# Altium PCB USB_pwrmtr_v2.PcbDoc (part 1 of 2)
Units mm, origin at the board's own origin, x right, y up, seen from the top; angles counter-clockwise.
Board outline 25 x 55.1 mm, 4 copper layers (Top Layer, Layer 1, Layer 2, Bottom Layer), stack 1.564 mm thick; 63 components, 50 nets, 344 pads, 256 vias.
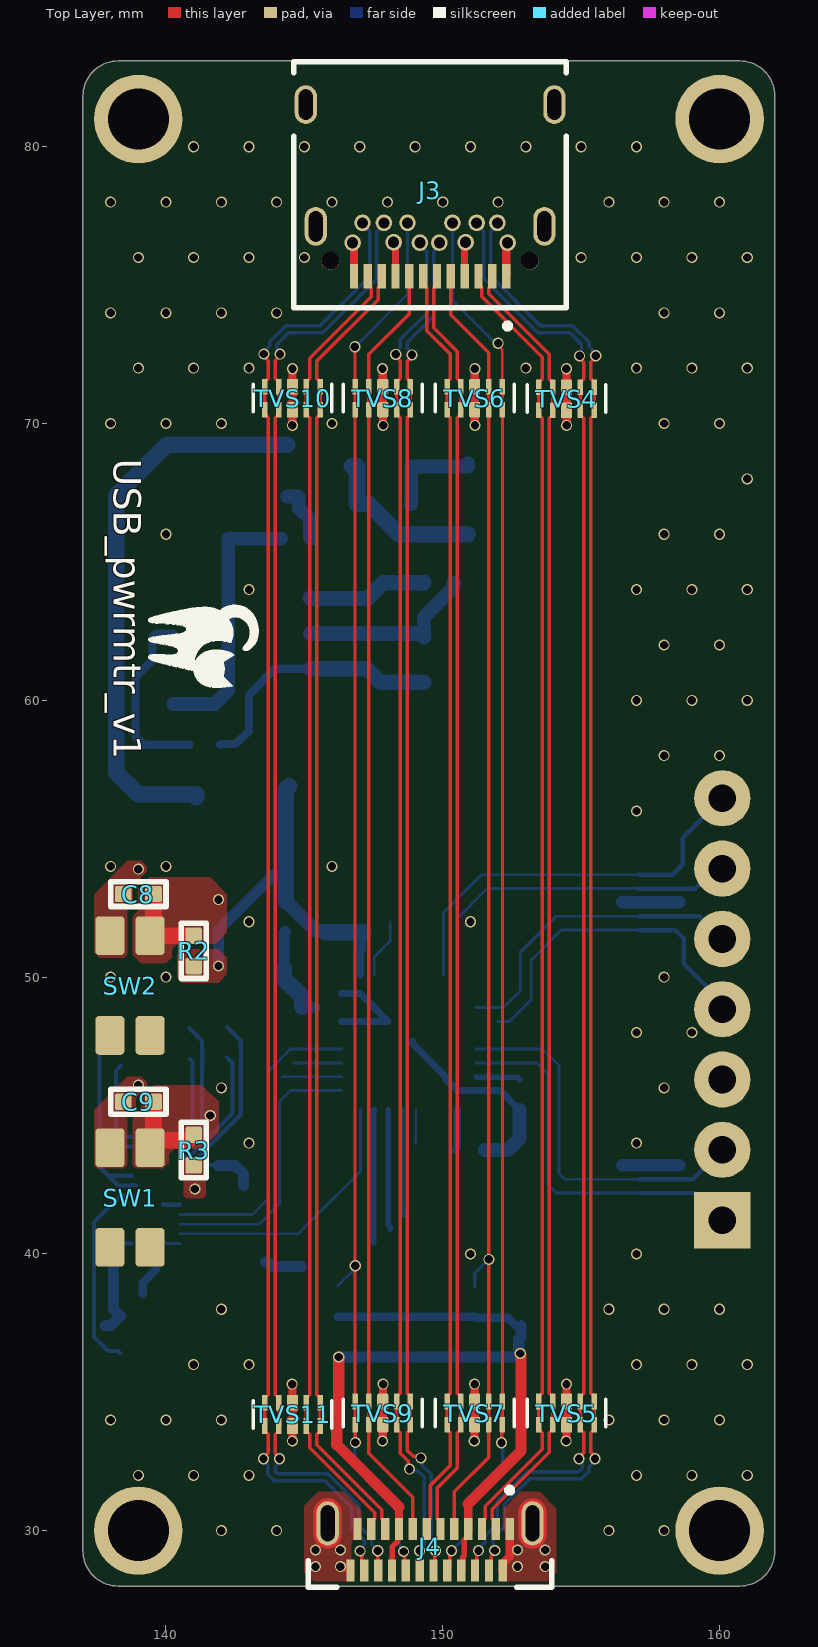
[diagram p0: Top Layer view]
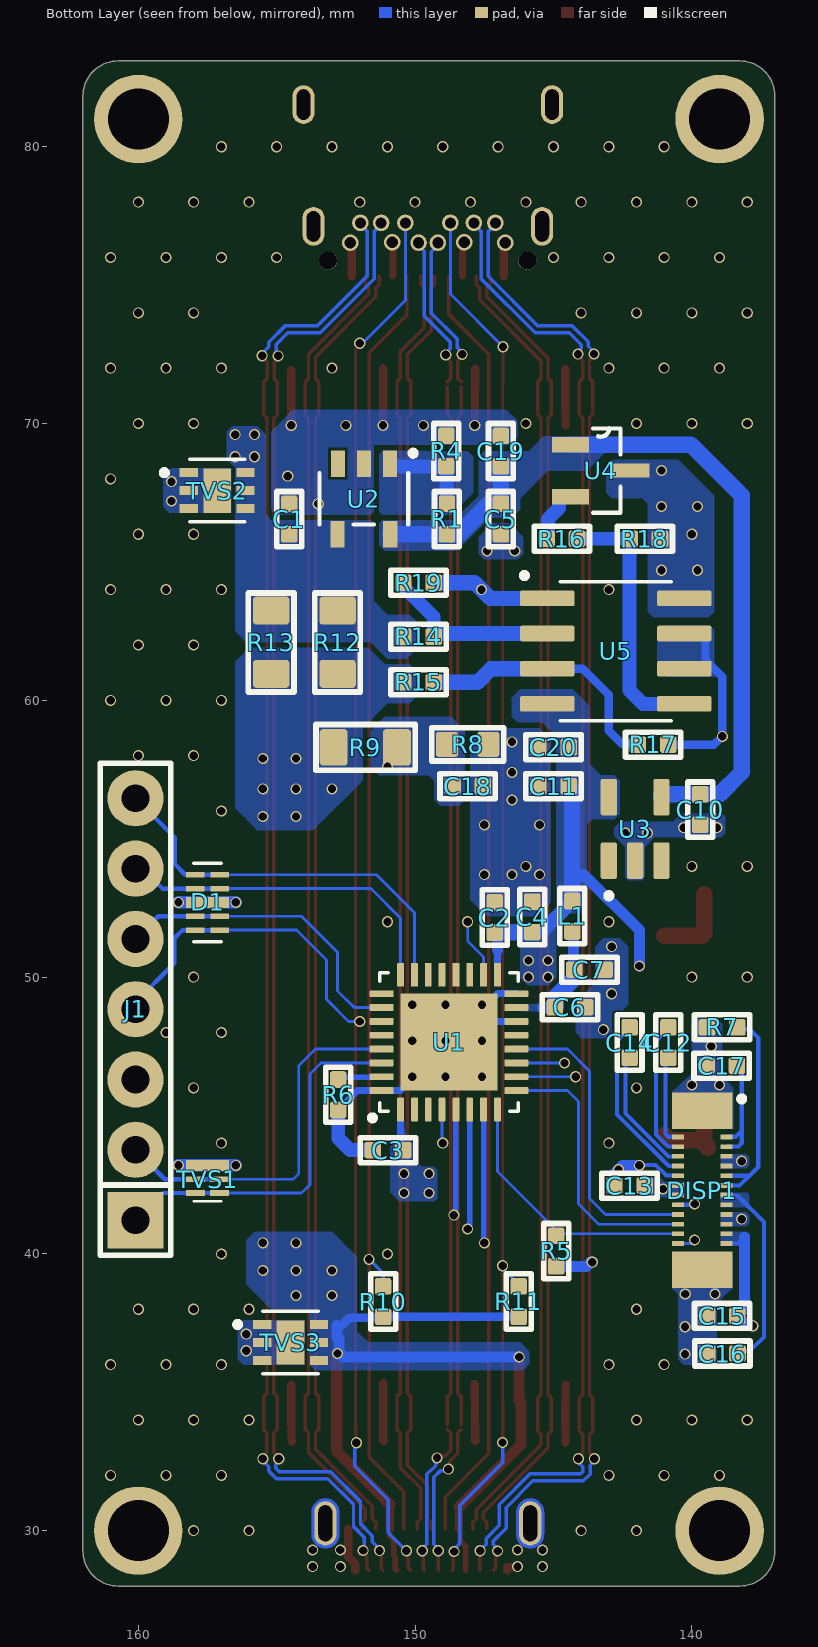
[diagram p1: Bottom Layer view, seen from below]
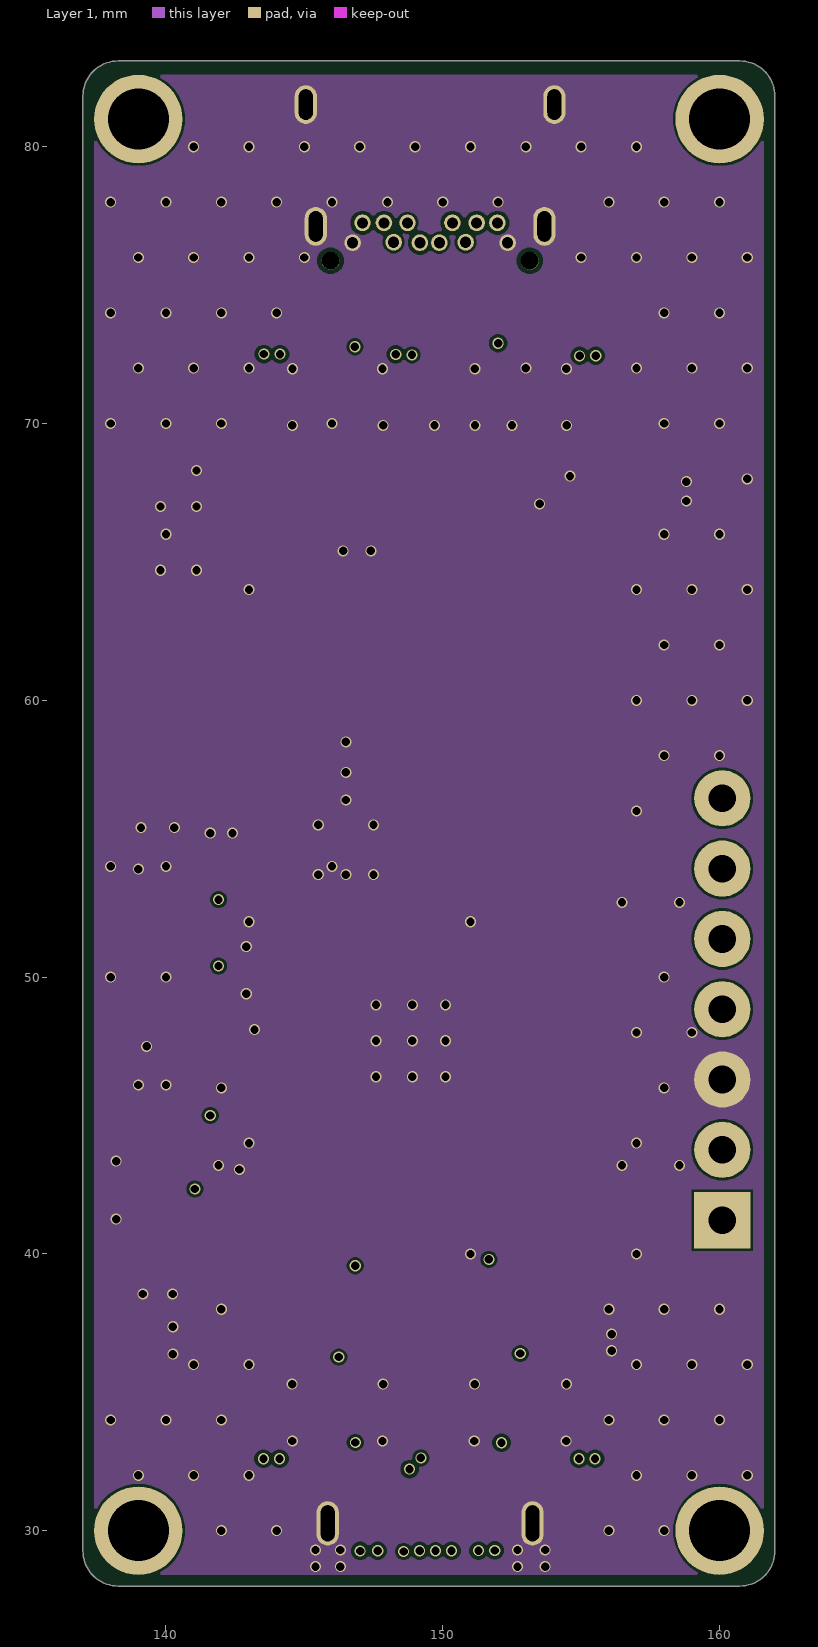
[diagram p2: Layer 1]
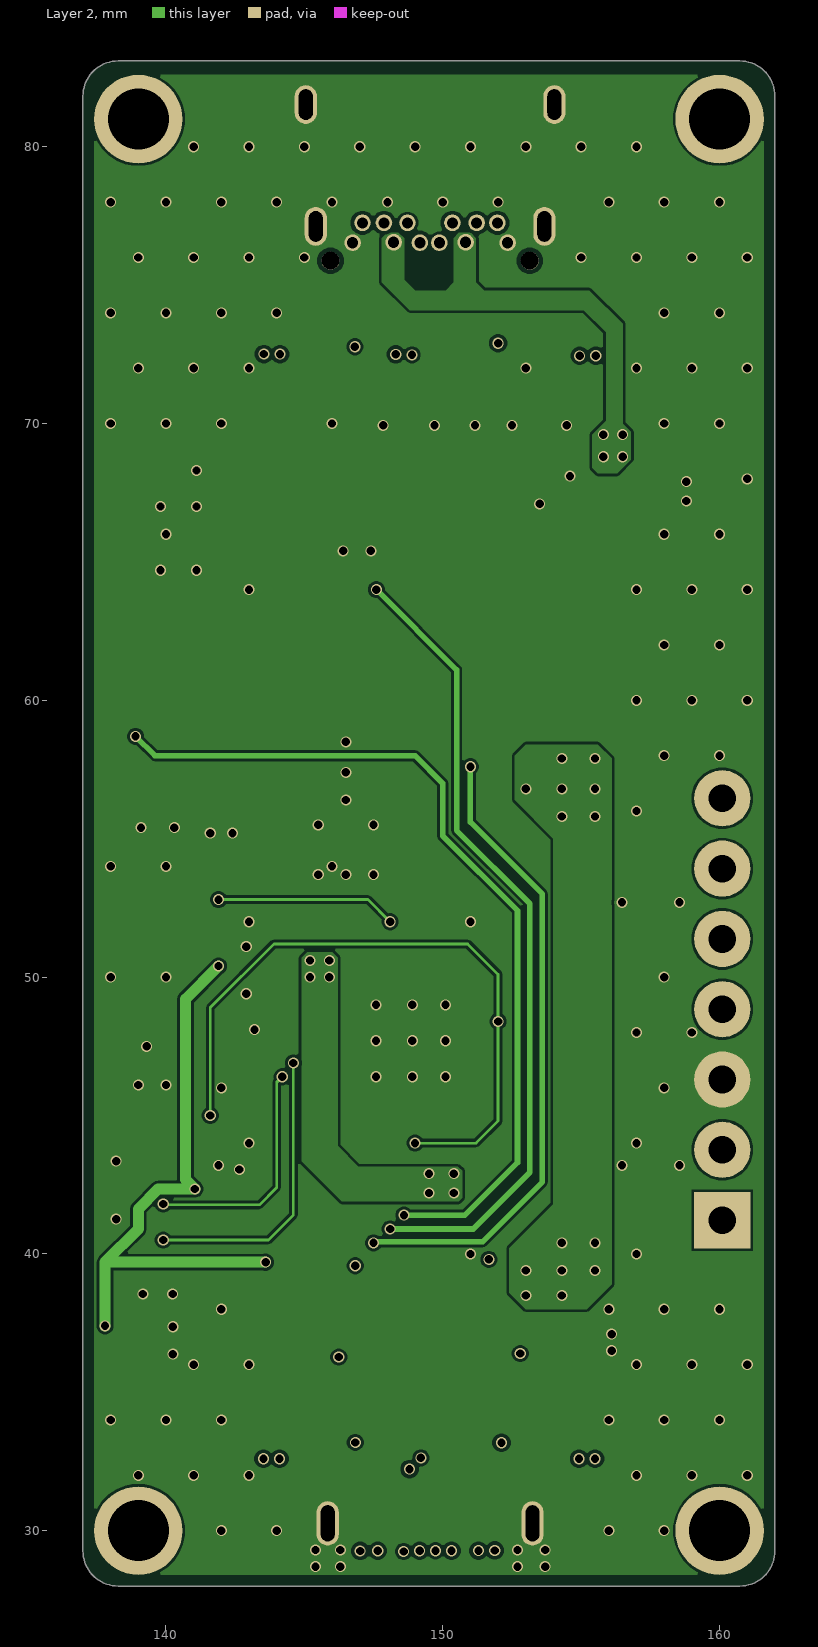
[diagram p3: Layer 2]
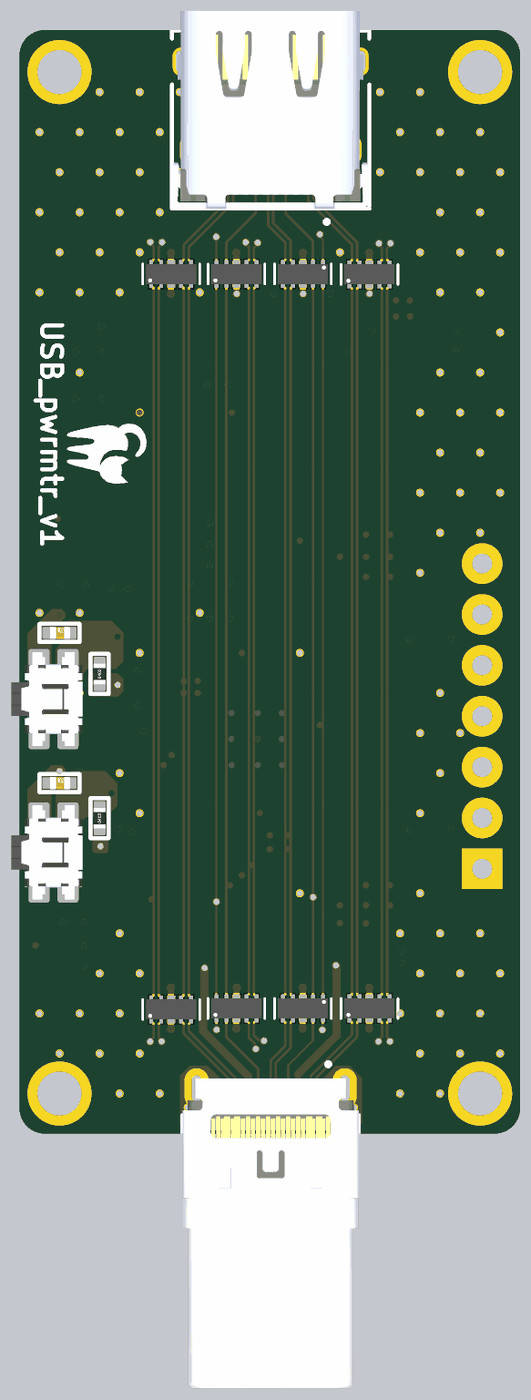
[diagram p5: 3D render of the assembled board from above, using the file's embedded part models]
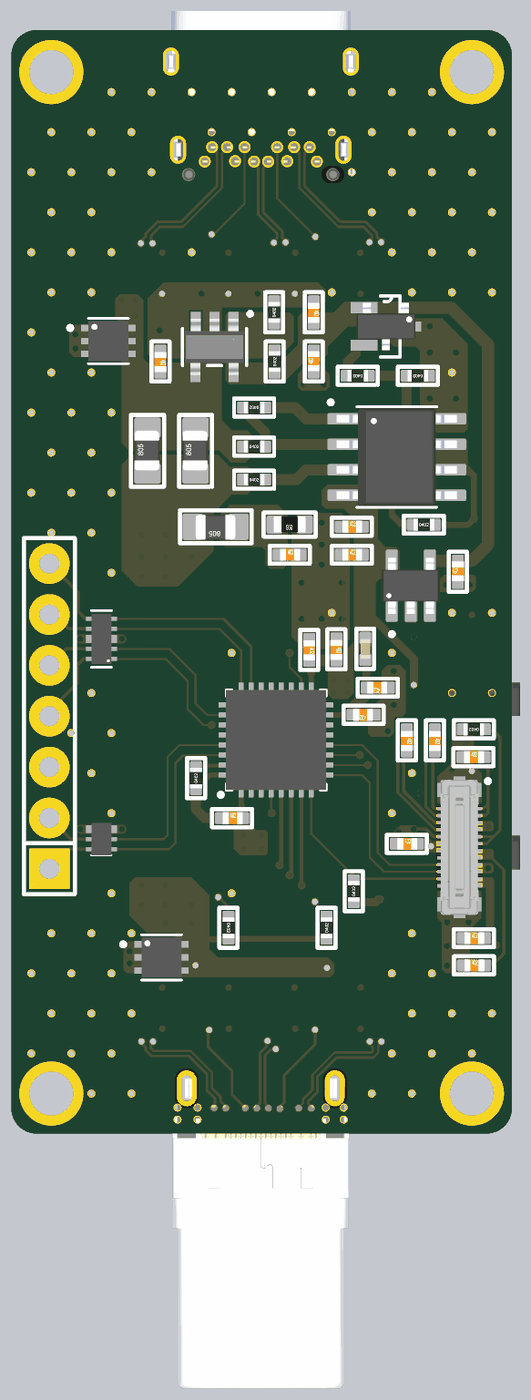
[diagram p6: 3D render of the assembled board from below, using the file's embedded part models]

## Layer stack, top to bottom
Top Solder: solder mask 0.0254, SM-001, Dk 4
Top Layer: signal copper 0.035
Dielectric 1: prepreg 0.0994, 3313_JLC, Dk 4.1
Layer 1: signal copper 0.0152
Dielectric 3: core 1.265, Core_JLC, Dk 4.6
Layer 2: signal copper 0.0152
Dielectric 5: prepreg 0.0994, 3313_JLC, Dk 4.1
Bottom Layer: signal copper 0.035
Bottom Solder: solder mask 0.0254, SM-001, Dk 4

## Board outline
137,29.27 ccw(c138.27,29.27) 138.27,28 160.73,28 ccw(c160.73,29.27) 162,29.27 162,81.83 ccw(c160.73,81.83) 160.73,83.1 138.27,83.1 ccw(c138.27,81.83) 137,81.83

## Design rules (kind name [scope] priority, off if disabled: settings)
Clearance Clearance_CC [InNetClass('USB_CC')] p1: gap=0.127 ignorepadtopadclearanceinfootprint=TRUE except(0.09: Arc-Arc Arc-Track Arc-SMDPad Arc-THPad Track-Track Track-SMDPad Track-THPad SMDPad-SMDPad; 0.1: SMDPad-Via; 0.15: Arc-Text Arc-Hole Track-Text Track-Hole SMDPad-Text SMDPad-Hole THPad-Text THPad-Hole Via-Text Via-Hole Fill-Text Fill-Hole Poly-Text Poly-Hole Region-Text Region-Hole Text-Text Text-Hole; 0.2: SMDPad-THPad THPad-THPad)
Clearance USB_DIFF [InNetClass('USB_diff')] p2: gap=0.127 ignorepadtopadclearanceinfootprint=TRUE
Clearance [All] p3: gap=0.127 ignorepadtopadclearanceinfootprint=TRUE except(0.09: Arc-Arc Arc-Track Arc-SMDPad Arc-Poly Track-Track Track-SMDPad Track-Via Track-Poly SMDPad-SMDPad SMDPad-Poly THPad-Poly Via-Poly Fill-Poly Poly-Poly; 0.1: Arc-THPad Track-THPad SMDPad-THPad SMDPad-Via THPad-THPad; 0.15: Arc-Text Arc-Hole Track-Text Track-Hole SMDPad-Text SMDPad-Hole THPad-Text THPad-Hole Via-Text Via-Hole Fill-Text Fill-Hole Poly-Text Poly-Hole Region-Text Region-Hole Text-Text Text-Hole)
DiffPairsRouting DP90 [All] p1: maxlimit=0.176 minlimit=0.127 mostfreqgap=0.176 toplayer_maxgap=0.127 toplayer_prefgap=0.127 toplayer_minwidth=0.125 toplayer_maxwidth=0.125 toplayer_prefwidth=0.125 bottomlayer_maxgap=0.127 bottomlayer_prefgap=0.127 bottomlayer_minwidth=0.125 bottomlayer_maxwidth=0.125 bottomlayer_prefwidth=0.125 impedanceprofiledriven=TRUE impedanceprofileid={B03D72C3-77A7-45F4-9808-55396643D503} impedanceprofilevalue=90.000000 maxuncoupledlength=12.7
HoleToHoleClearance [All] p1: gap=0 allowstackedmicrovias=TRUE
MinimumSolderMaskSliver [All] p1: minsoldermaskwidth=0
PolygonConnect [All] p1: connectstyle=Direct reliefconductorwidth=0.254 reliefentries=4 polygonreliefangle="90 Angle" airgapwidth=0.254
RoutingVias Via [All] p1: holewidth=0.2 width=0.45 viastyle="Through Hole" minholewidth=0.2 minwidth=0.45 maxholewidth=0.65 maxwidth=0.9
SilkToSolderMaskClearance [IsPad] p1: minsilkscreentomaskgap=0 clearancetoexposedcopper=TRUE
SolderMaskExpansion [All] p1: expansion=0 istentingtop=FALSE
SupplyNets "Schematic Supply Nets_6" [InNet('CABLE_VCC_USB_C')] p1: voltage=0.000
SupplyNets "Schematic Supply Nets_5" [InNet('VDD')] p2: voltage=0.000
SupplyNets "Schematic Supply Nets_3" [InNet('4V')] p3: voltage=0.000
SupplyNets "Schematic Supply Nets_2" [InNet('GND')] p4: voltage=0.000
SupplyNets "Schematic Supply Nets_1" [InNet('DUT_VCC_USB_C')] p5: voltage=0.000
SupplyNets "Schematic Supply Nets" [InNet('VDDA')] p6: voltage=0.000
UnRoutedNet [All] p1: checkbadconnections=TRUE
Width "Signal line" [All] p1: maxlimit=1816.048 minlimit=0.1 preferedwidth=0.1 minimp=50.000000 maximp=50.000000 favimp=50.000000
25 further rules are at their usual default settings.

## Classes and differential pairs
net class USB_CC: D2_P SBU2
net class USB_diff: D1_N D1_P D2_P SSRX1_N SSRX1_P SSRX2_N SSRX2_P SSTX1_N SSTX1_P SSTX2_N SSTX2_P
differential pair D2: +D2_P -D2_N
differential pair SSTX2: +SSTX2_P -SSTX2_N
differential pair SSTX1: +SSTX1_P -SSTX1_N
differential pair SSRX2: +SSRX2_P -SSRX2_N
differential pair SSRX1: +SSRX1_P -SSRX1_N
differential pair D1: +D1_P -D1_N

## Components (designator, comment, footprint, x,y, rotation, side; value= is the part's Value field where it differs from the comment)
C1 "100nF" C0402 154.55,66.546 r270 bottom
C2 "100nF" C0402 147.125,52.15 r270 bottom
C3 "100nF" C0402 150.975,43.75 r180 bottom
C4 "4.7uF" C0402 145.768,52.175 r270 bottom
C5 "470nF" C0402 146.9,66.546 r90 bottom
C6 "100nF" C0402 144.407,48.91 r0 bottom
C7 "1uF" C0402 143.7,50.268 r0 bottom
C8 "100nF" C0402 139,53 r0 top
C9 "100nF" C0402 139,45.5 r0 top
C10 "100nF" C0402 139.7,56.05 r90 bottom
C11 "470nF" C0402 145,56.9 r180 bottom
C12 "1uF" C0402 140.85,47.634 r270 bottom
C13 "1uF" C0402 142.25,42.467 r180 bottom
C14 "1uF" C0402 142.25,47.634 r270 bottom
C15 "1u" C0402 138.904,37.759 r180 bottom
C16 "2u2" C0402 138.9,36.402 r180 bottom
C17 "2u2" C0402 138.922,46.796 r180 bottom
C18 "10nF" C0402 148.1,56.9 r180 bottom
C19 "100nF" C0402 146.9,69.003 r270 bottom
C20 "100nF" C0402 145,58.3 r180 bottom
D1 "RCLAMP0524PATCT" DIO_RCLAMP0524PATCT 157.5,52.7 r0 bottom
DISP1 "WP26DK-S024VA3" WP26DK-S024VA3 139.625,42.3 r90 bottom
J1 "CON7" SIP7 160.1,48.84 r90 bottom
J3 "USB4056-03-A" USB4056-03-A 149.65,79.2 r180 top
J4 "USB4155-03-C" USB4155-03-C 149.542,29.314 r0 top
L1 "ILHB0402ER102VHF12" L0402 144.325,52.2 r270 bottom
R1 "20k" R0402 148.85,66.546 r90 bottom
R2 "10k" R0402 141,50.95 r90 top
R3 "10k" R0402 141,43.75 r90 top
R4 "6k" R0402 148.875,69.003 r90 bottom
R5 "10k" R0402 144.9,40.1 r90 bottom
R6 "10k" R0402 152.775,45.75 r90 bottom
R7 "620k" R0402 138.904,48.184 r0 bottom
R8 "1k" R0603 148.1,58.407 r0 bottom
R9 "10k" R0805 151.8,58.3 r0 bottom
R10 "56k" R0402 151.155,38.278 r270 bottom
R11 "56k" R0402 146.257,38.278 r90 bottom
R12 "10mΩ" R0805 152.8,62.1 r90 bottom
R13 "10mΩ" R0805 155.2,62.1 r90 bottom
R14 "300Ω" R0402 149.875,62.3 r180 bottom
R15 "300Ω" R0402 149.875,60.65 r180 bottom
R16 "10k" R0402 144.7,65.835 r0 bottom
R17 "18k" R0402 141.4,58.4 r180 bottom
R18 "10k" R0402 141.7,65.835 r0 bottom
R19 "18k" R0402 149.875,64.25 r0 bottom
SW1 "EVQP7B01P" EVQP7B01P 138.7,42.037 r270 top
SW2 "EVQP7B01P" EVQP7B01P 138.7,49.694 r270 top
TVS1 "RCLAMP0522P.TCT" RCLAMP0522PTCT 157.5,42.7 r90 bottom
TVS2 "TVS2200DRVR" TVS2200DRVR 157.15,67.575 r180 bottom
TVS3 "TVS2200DRVR" TVS2200DRVR 154.5,36.8 r180 bottom
TVS4 "TPD4E02B04" TPD4E02B04 154.475,70.9 r90 top
TVS5 "TPD4E02B04" TPD4E02B04 154.475,34.25 r90 top
TVS6 "TPD4E05U06DQAR" TPD4E05U06DQAR 151.154,70.917 r270 top
TVS7 "TPD4E05U06DQAR" TPD4E05U06DQAR 151.154,34.25 r270 top
TVS8 "TPD4E05U06DQAR" TPD4E05U06DQAR 147.832,70.917 r90 top
TVS9 "TPD4E05U06DQAR" TPD4E05U06DQAR 147.832,34.25 r90 top
TVS10 "TPD4E02B04" TPD4E02B04 144.575,70.917 r90 top
TVS11 "TPD4E02B04" TPD4E02B04 144.575,34.2 r90 top
U1 "STM32G431KBU3" STM32G431KBU3 148.775,47.65 r90 bottom
U2 "ST715MR" ST715MR 151.85,67.275 r270 bottom
U3 "ST715M33R" ST715M33R 142.05,55.355 r90 bottom
U4 "REF3033AIDBZR" REF3033AIDBZR 143.292,68.3 r180 bottom
U5 "OPA2387" LMV358IDT 142.75,61.779 r180 bottom

## Footprints (in the part's own frame and the unit in brackets; to place one, negate y for a bottom-side part, rotate by r counter-clockwise, add the part's x,y. Pads: shape width x height; smd on the part's side, far side on the other; paste and mask are expansions set on the pad)
C0402 [mm]
  rrect25% 0.6x0.59 smd: 1(-0.55,0) 2(0.55,0)
  silkscreen extent -1,-0.45 1,0.45, body extent -0.48,-0.3 0.52,0.3, height 0.2
DIO_RCLAMP0524PATCT [mm]
  rect 0.675x0.2 smd: 1(-0.437,1) 2(-0.437,0.5) 4(-0.437,-0.5) 5(-0.437,-1) 6(0.437,-1) 7(0.437,-0.5) 9(0.437,0.5) 10(0.437,1)
  rect 1.55x0.4 smd: 3_8(0,0)
  silkscreen extent -0.5,-1.42 0.5,1.42, body extent -0.5,-1.25 0.5,1.25, height 0.65
EVQP7B01P [mm] "Switch Tactile N.O. SPST Rectangular Button J-Bend 0.05A 12VDC 2.2N SMD T/R"
  rrect25% 1.4x1.05 smd: 1(-1.8,0.725) 1'(1.8,0.725) 2(-1.8,-0.725) 2'(1.8,-0.725)
  body extent -2.35,-2.1 2.35,1.45, height 1.35
L0402 [mm]
  rrect25% 0.6x0.59 smd: 1(-0.55,0) 2(0.55,0)
  silkscreen extent -1,-0.45 1,0.45, body extent -0.5,-0.25 0.5,0.25, height 0.51
LMV358IDT [mm] "Standard (General Purpose) Amplifier 2 Circuit Rail-to-Rail 8-SOIC"
  rrect25% 1.97x0.57 smd: 1(-2.475,1.905) 2(-2.475,0.635) 3(-2.475,-0.635) 4(-2.475,-1.905) 5(2.475,-1.905) 6(2.475,-0.635) 7(2.475,0.635) 8(2.475,1.905)
  silkscreen extent -3.4,-2.51 2,2.83, body extent -3,-2.45 3,2.45, height 1.75
R0402 [mm]
  rrect25% 0.6x0.59 smd: 1(-0.55,0) 2(0.55,0)
  silkscreen extent -1,-0.45 1,0.45, body extent -0.52,-0.3 0.52,0.3, height 0.34
R0603 [mm]
  rrect25% 0.8x0.9 smd: 1(-0.75,0) 2(0.75,0)
  silkscreen extent -1.3,-0.6 1.3,0.6, body extent -0.8,-0.4 0.8,0.4, height 0.3
R0805 [mil]
  rrect25% 40x51.97 smd: 1(-45,0) 2(45,0)
  silkscreen extent -71,-32 70,32, body extent -39,-24 39,26, height 31
RCLAMP0522PTCT [mm]
  rect 0.2x0.68 smd: 1(-0.5,-0.435) 2(0,-0.435) 5(0,0.435) 6(-0.5,0.435)
  rect 0.4x0.775 smd: 3(0.5,-0.388) 4(0.5,0.387)
  silkscreen extent -0.8,-0.5 -0.8,0.5, body extent -0.8,-0.5 0.8,0.5, height 0.58
REF3033AIDBZR [mil] "3.3-V voltage reference;   50-ppm/°C, 50-µA in 3-pin SOT-23 package series (bandgap)"
  rect 52x22 smd: 1(-43,37) 2(-43,-37)
  rect 52x20 smd: 3(43,0)
  silkscreen extent -11,-60 28,60, body extent -47,-57 47,57, height 44
SIP7 [mil]
  rect 80x80 hole 39.37: 1(-300,0)
  round 80 hole 39.37: 2(-200,0) 3(-100,0) 4(0,0) 5(100,0) 6(200,0) 7(300,0)
  silkscreen extent -350,-50 350,50
ST715M33R [mm] "Linear Voltage Regulator IC Positive Fixed 1 Output 85mA SOT-23-5"
  rrect25% 1.32x0.59 smd: 1(-1.145,0.95) 2(-1.145,0) 3(-1.145,-0.95) 4(1.145,-0.95) 5(1.145,0.95)
  silkscreen extent -2.51,0.85 -2.32,1.05, body extent -1.4,-1.45 1.4,1.45, height 1.45
ST715MR [mil] "Linear Voltage Regulator IC Positive Adjustable 1 Output 85mA SOT-23-5"
  rect 37.5x20 smd paste+0 mask+0: 1(-50.25,37) 2(-50.25,0) 3(-50.25,-37) 4(50.25,-37.5) 5(50.25,37.5)
  silkscreen extent -69,-63 37,74, body extent -55,-58 55,58, height 57
STM32G431KBU3 [mm] "ARM® Cortex®-M4F STM32G4 Microcontroller IC 32-Bit Single-Core 170MHz 128KB (128K x 8) FLASH 32-UFQFPN (5x5)"
  rrect25% 0.86x0.25 smd: 1(-2.435,1.75) 2(-2.435,1.25) 3(-2.435,0.75) 4(-2.435,0.25) 5(-2.435,-0.25) 6(-2.435,-0.75) 7(-2.435,-1.25) 8(-2.435,-1.75) 17(2.435,-1.75) 18(2.435,-1.25) 19(2.435,-0.75) 20(2.435,-0.25) 21(2.435,0.25) 22(2.435,0.75) 23(2.435,1.25) 24(2.435,1.75)
  rrect25% 0.25x0.86 smd: 9(-1.75,-2.435) 10(-1.25,-2.435) 11(-0.75,-2.435) 12(-0.25,-2.435) 13(0.25,-2.435) 14(0.75,-2.435) 15(1.25,-2.435) 16(1.75,-2.435) 25(1.75,2.435) 26(1.25,2.435) 27(0.75,2.435) 28(0.25,2.435) 29(-0.25,2.435) 30(-0.75,2.435) 31(-1.25,2.435) 32(-1.75,2.435)
  rect 3.5x3.5 smd paste-0.64: 33(0,0)
  silkscreen extent -2.83,-2.5 2.5,2.87, body extent -2.5,-2.5 2.5,2.5, height 0.6
TPD4E02B04 [mm]
  rect 0.565x0.2 smd mask+0: 1(-0.417,1) 2(-0.417,0.5) 4(-0.417,-0.5) 5(-0.417,-1) 6(0.417,-1) 7(0.417,-0.5) 9(0.417,0.5) 10(0.417,1)
  rect 0.565x0.4 smd paste-1 mask+0: 3(-0.417,0) 8(0.417,0)
  silkscreen extent -0.5,-1.42 0.5,1.42, body extent -0.5,-1.25 0.5,1.25, height 0.55
TPD4E05U06DQAR [mm] "Quad 0.5-pF, 5.5-V, ±12-kV ESD protection diode for USB, HDMI & High Speed Interfaces"
  rrect25% 0.565x0.2 smd mask+0: 1(-0.417,1) 2(-0.417,0.5) 4(-0.417,-0.5) 5(-0.417,-1) 6(0.417,-1) 7(0.417,-0.5) 9(0.417,0.5) 10(0.417,1)
  rrect25% 0.565x0.4 smd paste-1 mask+0: 3(-0.417,0) 8(0.417,0)
  silkscreen extent -0.5,-1.42 0.5,1.42, body extent -0.5,-1.25 0.5,1.25, height 0.55
TVS2200DRVR [mm]
  rect 0.66x0.32 smd: 1(-1.025,0.65) 2(-1.025,0) 3(-1.025,-0.65) 4(1.025,-0.65) 5(1.025,0) 6(1.025,0.65)
  rect 1x1.6 smd paste-2: 7(0,0)
  silkscreen extent -2.01,-1.13 1,1.13, body extent -1,-1 1,1, height 0.8
USB4056-03-A [mm]
  rect 0.3x0.9 smd: A1(-2.642,3.877) A2(-2.142,3.877) A3(-1.642,3.877) A4(-1.142,3.877) A5(-0.642,3.877) A6(-0.142,3.877) A7(0.358,3.877) A8(0.858,3.877) A9(1.358,3.877) A10(1.858,3.877) A11(2.358,3.877) A12(2.858,3.877)
  round 0.6 hole 0.4: B1(2.908,2.667) B2(2.55,1.95) B3(1.775,1.95) B4(1.425,2.65) B5(0.925,1.95) B6(0.475,2.667) B7(-0.225,2.667) B8(-0.7,1.95) B9(-1.175,2.65) B10(-1.575,1.95) B11(-2.325,1.95) B12(-2.692,2.667)
  oval 0.8x1.4 hole 0.5 slot 1.1 at 90 deg: S1(-4.022,2.077) S2(4.238,2.077) S3(-4.382,-2.323) S4(4.598,-2.323)
  round 0.65 hole 0.65 unplated: ""(-3.492,3.317) ""(3.708,3.317)
  silkscreen extent -4.82,-3.87 5.03,5.78, body extent -4.8,-4.85 5.05,5.02, height 3.31
USB4155-03-C [mm] "USB-C (USB TYPE-C) USB 3.2 Gen 2 (USB 3.1 Gen 2, Superspeed + (USB 3.1)) Plug Connector 24 Position Board Edge, Cutout; Surface Mount; Through Hole, Right Angle"
  rect 0.3x0.8 smd: A1(2.875,0.75) A2(2.375,0.75) A3(1.875,0.75) A4(1.375,0.75) A5(0.875,0.75) A6(0.375,0.75) A7(-0.125,0.75) A8(-0.625,0.75) A9(-1.125,0.75) A10(-1.625,0.75) A11(-2.125,0.75) A12(-2.625,0.75) B1(-2.875,-0.75) B2(-2.375,-0.75) B3(-1.875,-0.75) B4(-1.375,-0.75) B5(-0.875,-0.75) B6(-0.375,-0.75) B7(0.125,-0.75) B8(0.625,-0.75) B9(1.125,-0.75) B10(1.625,-0.75) B11(2.125,-0.75) B12(2.625,-0.75)
  oval 0.8x1.6 hole 0.5 slot 1.3 at 90 deg mask+0: S1(-3.7,0.95) S2(3.7,0.95)
  Top Layer region: -3.674,1.849 -3.648,1.847 -3.622,1.844 -3.596,1.839 -3.571,1.833 -3.545,1.826 -3.521,1.817 -3.497,1.807 -3.473,1.796 -3.45,1.783 -3.428,1.769 -3.406,1.755 -3.385,1.739 -3.365,1.722 -3.346,1.704 -3.328,1.685 -3.311,1.665 -3.295,1.644 -3.281,1.622 -3.267,1.6 -3.254,1.577 -3.243,1.553 -3.233,1.529 -3.224,1.505 -3.217,1.479 -3.211,1.454 -3.206,1.428 -3.203,1.402 -3.201,1.376 -3.2,1.35 -3.2,0.55 -3.201,0.524 -3.203,0.498 -3.206,0.472 -3.211,0.446 -3.217,0.421 -3.224,0.395 -3.233,0.371 -3.243,0.347 -3.254,0.323 -3.267,0.3 -3.281,0.278 -3.295,0.256 -3.311,0.235 -3.328,0.215 -3.346,0.196 -3.365,0.178 -3.385,0.161 -3.406,0.145 -3.428,0.131 -3.45,0.117 -3.473,0.104 -3.497,0.093 -3.521,0.083 -3.545,0.074 -3.571,0.067 -3.596,0.061 -3.622,0.056 -3.648,0.053 -3.674,0.051 -3.7,0.05 -3.726,0.051 -3.752,0.053 -3.778,0.056 -3.804,0.061 -3.829,0.067 -3.855,0.074 -3.879,0.083 -3.903,0.093 -3.927,0.104 -3.95,0.117 -3.972,0.131 -3.994,0.145 -4.015,0.161 -4.035,0.178 -4.054,0.196 -4.072,0.215 -4.089,0.235 -4.105,0.256 -4.119,0.278 -4.133,0.3 -4.146,0.323 -4.157,0.347 -4.167,0.371 -4.176,0.395 -4.183,0.421 -4.189,0.446 -4.194,0.472 -4.197,0.498 -4.199,0.524 -4.2,0.55 -4.2,1.35 -4.199,1.376 -4.197,1.402 -4.194,1.428 -4.189,1.454 -4.183,1.479 -4.176,1.505 -4.167,1.529 -4.157,1.553 -4.146,1.577 -4.133,1.6 -4.119,1.622 -4.105,1.644 -4.089,1.665 -4.072,1.685 -4.054,1.704 -4.035,1.722 -4.015,1.739 -3.994,1.755 -3.972,1.769 -3.95,1.783 -3.927,1.796 -3.903,1.807 -3.879,1.817 -3.855,1.826 -3.829,1.833 -3.804,1.839 -3.778,1.844 -3.752,1.847 -3.726,1.849 -3.7,1.85
  Top Layer region: 3.726,1.849 3.752,1.847 3.778,1.844 3.804,1.839 3.829,1.833 3.855,1.826 3.879,1.817 3.903,1.807 3.927,1.796 3.95,1.783 3.972,1.769 3.994,1.755 4.015,1.739 4.035,1.722 4.054,1.704 4.072,1.685 4.089,1.665 4.105,1.644 4.119,1.622 4.133,1.6 4.146,1.577 4.157,1.553 4.167,1.529 4.176,1.505 4.183,1.479 4.189,1.454 4.194,1.428 4.197,1.402 4.199,1.376 4.2,1.35 4.2,0.55 4.199,0.524 4.197,0.498 4.194,0.472 4.189,0.446 4.183,0.421 4.176,0.395 4.167,0.371 4.157,0.347 4.146,0.323 4.133,0.3 4.119,0.278 4.105,0.256 4.089,0.235 4.072,0.215 4.054,0.196 4.035,0.178 4.015,0.161 3.994,0.145 3.972,0.131 3.95,0.117 3.927,0.104 3.903,0.093 3.879,0.083 3.855,0.074 3.829,0.067 3.804,0.061 3.778,0.056 3.752,0.053 3.726,0.051 3.7,0.05 3.674,0.051 3.648,0.053 3.622,0.056 3.596,0.061 3.571,0.067 3.545,0.074 3.521,0.083 3.497,0.093 3.473,0.104 3.45,0.117 3.428,0.131 3.406,0.145 3.385,0.161 3.365,0.178 3.346,0.196 3.328,0.215 3.311,0.235 3.295,0.256 3.281,0.278 3.267,0.3 3.254,0.323 3.243,0.347 3.233,0.371 3.224,0.395 3.217,0.421 3.211,0.446 3.206,0.472 3.203,0.498 3.201,0.524 3.2,0.55 3.2,1.35 3.201,1.376 3.203,1.402 3.206,1.428 3.211,1.454 3.217,1.479 3.224,1.505 3.233,1.529 3.243,1.553 3.254,1.577 3.267,1.6 3.281,1.622 3.295,1.644 3.311,1.665 3.328,1.685 3.346,1.704 3.365,1.722 3.385,1.739 3.406,1.755 3.428,1.769 3.45,1.783 3.473,1.796 3.497,1.807 3.521,1.817 3.545,1.826 3.571,1.833 3.596,1.839 3.622,1.844 3.648,1.847 3.674,1.849 3.7,1.85
  Bottom Layer region: -3.674,1.849 -3.648,1.847 -3.622,1.844 -3.596,1.839 -3.571,1.833 -3.545,1.826 -3.521,1.817 -3.497,1.807 -3.473,1.796 -3.45,1.783 -3.428,1.769 -3.406,1.755 -3.385,1.739 -3.365,1.722 -3.346,1.704 -3.328,1.685 -3.311,1.665 -3.295,1.644 -3.281,1.622 -3.267,1.6 -3.254,1.577 -3.243,1.553 -3.233,1.529 -3.224,1.505 -3.217,1.479 -3.211,1.454 -3.206,1.428 -3.203,1.402 -3.201,1.376 -3.2,1.35 -3.2,0.55 -3.201,0.524 -3.203,0.498 -3.206,0.472 -3.211,0.446 -3.217,0.421 -3.224,0.395 -3.233,0.371 -3.243,0.347 -3.254,0.323 -3.267,0.3 -3.281,0.278 -3.295,0.256 -3.311,0.235 -3.328,0.215 -3.346,0.196 -3.365,0.178 -3.385,0.161 -3.406,0.145 -3.428,0.131 -3.45,0.117 -3.473,0.104 -3.497,0.093 -3.521,0.083 -3.545,0.074 -3.571,0.067 -3.596,0.061 -3.622,0.056 -3.648,0.053 -3.674,0.051 -3.7,0.05 -3.726,0.051 -3.752,0.053 -3.778,0.056 -3.804,0.061 -3.829,0.067 -3.855,0.074 -3.879,0.083 -3.903,0.093 -3.927,0.104 -3.95,0.117 -3.972,0.131 -3.994,0.145 -4.015,0.161 -4.035,0.178 -4.054,0.196 -4.072,0.215 -4.089,0.235 -4.105,0.256 -4.119,0.278 -4.133,0.3 -4.146,0.323 -4.157,0.347 -4.167,0.371 -4.176,0.395 -4.183,0.421 -4.189,0.446 -4.194,0.472 -4.197,0.498 -4.199,0.524 -4.2,0.55 -4.2,1.35 -4.199,1.376 -4.197,1.402 -4.194,1.428 -4.189,1.454 -4.183,1.479 -4.176,1.505 -4.167,1.529 -4.157,1.553 -4.146,1.577 -4.133,1.6 -4.119,1.622 -4.105,1.644 -4.089,1.665 -4.072,1.685 -4.054,1.704 -4.035,1.722 -4.015,1.739 -3.994,1.755 -3.972,1.769 -3.95,1.783 -3.927,1.796 -3.903,1.807 -3.879,1.817 -3.855,1.826 -3.829,1.833 -3.804,1.839 -3.778,1.844 -3.752,1.847 -3.726,1.849 -3.7,1.85
  Bottom Layer region: 3.726,1.849 3.752,1.847 3.778,1.844 3.804,1.839 3.829,1.833 3.855,1.826 3.879,1.817 3.903,1.807 3.927,1.796 3.95,1.783 3.972,1.769 3.994,1.755 4.015,1.739 4.035,1.722 4.054,1.704 4.072,1.685 4.089,1.665 4.105,1.644 4.119,1.622 4.133,1.6 4.146,1.577 4.157,1.553 4.167,1.529 4.176,1.505 4.183,1.479 4.189,1.454 4.194,1.428 4.197,1.402 4.199,1.376 4.2,1.35 4.2,0.55 4.199,0.524 4.197,0.498 4.194,0.472 4.189,0.446 4.183,0.421 4.176,0.395 4.167,0.371 4.157,0.347 4.146,0.323 4.133,0.3 4.119,0.278 4.105,0.256 4.089,0.235 4.072,0.215 4.054,0.196 4.035,0.178 4.015,0.161 3.994,0.145 3.972,0.131 3.95,0.117 3.927,0.104 3.903,0.093 3.879,0.083 3.855,0.074 3.829,0.067 3.804,0.061 3.778,0.056 3.752,0.053 3.726,0.051 3.7,0.05 3.674,0.051 3.648,0.053 3.622,0.056 3.596,0.061 3.571,0.067 3.545,0.074 3.521,0.083 3.497,0.093 3.473,0.104 3.45,0.117 3.428,0.131 3.406,0.145 3.385,0.161 3.365,0.178 3.346,0.196 3.328,0.215 3.311,0.235 3.295,0.256 3.281,0.278 3.267,0.3 3.254,0.323 3.243,0.347 3.233,0.371 3.224,0.395 3.217,0.421 3.211,0.446 3.206,0.472 3.203,0.498 3.201,0.524 3.2,0.55 3.2,1.35 3.201,1.376 3.203,1.402 3.206,1.428 3.211,1.454 3.217,1.479 3.224,1.505 3.233,1.529 3.243,1.553 3.254,1.577 3.267,1.6 3.281,1.622 3.295,1.644 3.311,1.665 3.328,1.685 3.346,1.704 3.365,1.722 3.385,1.739 3.406,1.755 3.428,1.769 3.45,1.783 3.473,1.796 3.497,1.807 3.521,1.817 3.545,1.826 3.571,1.833 3.596,1.839 3.622,1.844 3.648,1.847 3.674,1.849 3.7,1.85
  silkscreen extent -4.4,-1.35 4.4,2.25, body extent -4.4,-14.05 4.4,1.45, height 1.6
WP26DK-S024VA3 [mm]
  rect 0.17x0.44 smd paste+0 mask+0: 1(1.925,-0.88) 2(1.925,0.88) 3(1.575,-0.88) 4(1.575,0.88) 5(1.225,-0.88) 6(1.225,0.88) 7(0.875,-0.88) 8(0.875,0.88) 9(0.525,-0.88) 10(0.525,0.88) 11(0.175,-0.88) 12(0.175,0.88) 13(-0.175,-0.88) 14(-0.175,0.88) 15(-0.525,-0.88) 16(-0.525,0.88) 17(-0.875,-0.88) 18(-0.875,0.88) 19(-1.225,-0.88) 20(-1.225,0.88) 21(-1.575,-0.88) 22(-1.575,0.88) 23(-1.925,-0.88) 24(-1.925,0.88)
  rect 1.33x2.2 smd paste-2 mask+0: P1(2.87,0) P2(-2.87,0)
  silkscreen extent 3.2,-1.52 3.4,-1.33, body extent -3.37,-0.95 3.37,0.95, height 0.6

## Part data
C1: library part C, "Kondensator ceramiczny SMD", Voltage=25V
C2 C3 C4 C5 C6 C7 C8 C9 C10 C11 C12 C13 C14 C15 C16 C17 C18 C19 C20: library part C, "Kondensator ceramiczny SMD"
D1: "15V Clamp 5A (8/20Âµs) Ipp Tvs Diode Surface Mount SLP2510P8", Package="UFDFN-10 Semtech", Check_prices=https://www.snapeda.com/parts/RCLAMP0524PATCT/Semtech+Corporation/view-part/?ref=eda, MF="Semtech Corporation", MP=RCLAMP0524PATCT, SnapEDA_Link=https://www.snapeda.com/parts/RCLAMP0524PATCT/Semtech+Corporation/view-part/?ref=snap
J1: "Connector"
J3 J4: "USB-C (USB TYPE-C) USB 3.2 Gen 2 (USB 3.1 Gen 2, Superspeed + (USB 3.1)) Receptacle Connector 24 Position Surface Mount, Right Angle; Through Hole"
L1: library part L, "Cewka/Koralik ferrytowy"
R1 R2 R3 R4 R5 R6 R7 R8 R9 R10 R11 R12 R13 R14 R15 R16 R17 R18 R19: library part R, "Rezystor SMD"
SW1 SW2: "Switch Tactile N.O. SPST Rectangular Button J-Bend 0.05A 12VDC 2.2N SMD T/R"
TVS1: "TVS Diode (Bi-directional)", Manufacturer_Name=SEMTECH, Mouser Part Number=947-RCLAMP0522P.TCT, Arrow Part Number=RCLAMP0522P.TCT, Arrow Price/Stock=https://www.arrow.com/en/products/rclamp0522p.tct/semtech?utm_currency=USD&region=nac, Datasheet Link=https://www.digikey.ph/en/products/detail/semtech-corporation/RCLAMP0522P-TCT/5113632, Height=0.65mm, Manufacturer_Part_Number=RCLAMP0522P.TCT, Mouser Price/Stock=https://www.mouser.co.uk/ProductDetail/Semtech/RCLAMP0522P.TCT?qs=rBWM4%252BvDhIdKBWbIaH8MsA%3D%3D
TVS2 TVS3: "22V flat-clamp surge protection device", ComponentLink1Description="New link", ComponentLink1URL=https://www.mouser.pl/ProductDetail/Texas-Instruments/TVS2200DRVR?qs=W0yvOO0ixfHPbvei2cYdIw%3D%3D
TVS6 TVS7 TVS8 TVS9: "ESD Protection Diodes / TVS Diodes 0.66-pF +/-3.6-V +/- 30-kV ESD protectio", ComponentLink1Description="New link", ComponentLink1URL=https://www.mouser.pl/ProductDetail/Texas-Instruments/TPD4E05U06DQAR?qs=%2FCrDlo5IrVPi4woOvWz0qA%3D%3D
U1: "ARM® Cortex®-M4F STM32G4 Microcontroller IC 32-Bit Single-Core 170MHz 128KB (128K x 8) FLASH 32-UFQFPN (5x5)", ComponentLink1Description="New link", ComponentLink1URL=https://www.mouser.pl/ProductDetail/STMicroelectronics/STM32G431KBU3?qs=PzGy0jfpSMtowkKWTRQBRw%3D%3D
U2: "Linear Voltage Regulator IC Positive Adjustable 1 Output 85mA SOT-23-5"
U3: "Linear Voltage Regulator IC Positive Fixed 1 Output 85mA SOT-23-5", ComponentLink1Description="New link", ComponentLink1URL=https://www.tme.eu/pl/details/st715m33r/stabilizatory-napiecia-nieregulowane-ldo/stmicroelectronics/
U4: "3.3-V voltage reference;   50-ppm/°C, 50-µA in 3-pin SOT-23 package series (bandgap)"
U5: "V_IO = 0.002 mV, Ultra-High Precision, Zero-Drift, Low-Input-Bias-Current Op Amps"
TVS4 TVS5 TVS10 TVS11: ComponentLink1Description="New link", ComponentLink1URL=https://www.mouser.pl/ProductDetail/Texas-Instruments/TPD4E02B04DQAR?qs=8%2FmU9qzJpL%2FFVYtHO1iV9g%3D%3D

## Free pads (board coordinates)
  round 3.2 hole 2.2: 2(139,30) 3(160,30) 4(139,81) 5(160,81)

## Via types
v1: diameter 0.4, hole 0.3, Top Layer to Bottom Layer, 112 vias
v2: diameter 0.4, hole 0.3, Layer 1 to Bottom Layer, tented both sides, 53 vias
v3: diameter 0.4, hole 0.3, Layer 2 to Bottom Layer, tented both sides, 41 vias
v4: diameter 0.4, hole 0.3, Top Layer to Bottom Layer, tented both sides, 34 vias
v5: diameter 0.4, hole 0.3, Top Layer to Layer 1, tented both sides, 14 vias
v6: diameter 0.4, hole 0.3, Top Layer to Layer 2, tented both sides, 2 vias

## Nets (pads, with @x,y where several pads share a name; then routed paths per layer and width w, separated by ;. In a path a pad name is that pad's centre, name@x,y a point inside that pad or via, vN(x,y) a via of type N, cw(c..) or ccw(c..) an arc to the next point about the centre after c; other vN are vias at no path point)
4V: C5.2 C10.2 C19.2 R1.1 U2.5 U3.4 U4.1 | length 26.3
  Bottom Layer w0.6: U3.4@141.1,56.5 141.1,56.595 141.095,56.6 C10.2@139.7,56.6 139,56.6 138.2,57.4 138.2,67.4 140.04,69.24 U4.1@144.384,69.24 ; C19.2@146.711,68.453 C19.2@146.9,68.453 C5.2@146.9,67.096 147.325,67.096 148.425,65.996 R1.1@148.85,65.996 148.853,65.999 U2.5@150.898,65.999
BOOT0: R6.2 U1.31 | length 1.6
  Bottom Layer w0.2: U1.31@151.21,46.4 151.235,46.375 152.7,46.375 R6.2@152.775,46.3
BUTTON0: C8.2 R2.2 SW2.1 U1.18 | length 11.6
  Top Layer w0.6: C8.2@139.55,53 139.55,51.569 139.625,51.494 139.631,51.5 R2.2@141,51.5
  Layer 2 w0.1: v6(141.9,52.8) 147.3,52.8 v3(148.1,52)
  Bottom Layer w0.1: U1.18@147.525,50.085 147.525,50.725 148.1,51.3 v3(148.1,52)
CABLE_VCC_USB_C: C1.2 J3.A4 J3.A9 J3.B4 J3.B9 R12.2 R13.2 R14.1 TVS2.4 TVS2.5 TVS2.6 U2.4 | length 2.5
  Top Layer w0.254: J3.B4@148.225,76.55 148.291,76.484 148.291,76.239 ; J3.A9@148.292,75.323 148.292,76.238 ; J3.A4@150.792,75.323 150.792,76.517 J3.B9@150.825,76.55
  other v3: 155.8,68.8 156.5,68.8 155.8,69.6 156.5,69.6
CC1: J3.A5 J4.A5 R10.1 TVS6.2 TVS6.9 TVS7.2 TVS7.9 | length 47.5
  Top Layer w0.125: J3.A5@150.292,75.323 150.292,73.926 151.654,72.564 TVS6.2@151.654,71.335 TVS6.9@151.654,70.5 151.659,70.495 151.659,39.807 151.654,39.802 151.659,39.797 151.659,34.672 TVS7.2@151.654,34.667 TVS7.9@151.654,33.833 151.654,32.644 150.417,31.407 J4.A5@150.417,30.064
  Bottom Layer w0.125: R10.1@151.155,38.828 151.155,39.294 v4(151.663,39.802)
CC2: J3.B5 J4.B5 R11.2 TVS8.1 TVS8.10 TVS9.1 TVS9.10 | length 51.3
  Top Layer w0.1: v4(146.825,72.775) 146.829,72.771 146.829,71.339 TVS8.10@146.832,71.335 TVS8.1@146.832,70.5 TVS9.10@146.832,34.667
  Top Layer w0.125: TVS9.10@146.832,34.667 TVS9.1@146.832,33.833 146.836,33.829 146.836,33.192 v4(146.839,33.189) ; v4(148.587,29.247) 148.627,29.207 148.627,28.604 J4.B5@148.667,28.564
  Bottom Layer w0.1: R11.2@146.202,38.828 146.202,38.837 146.837,39.472 v4(146.837,39.573) ; v4(146.825,72.775) 148.725,74.675 J3.B5@148.725,77.25
  Bottom Layer w0.125: v4(146.839,33.189) 146.825,33.175 146.825,32.473 148.379,30.919 148.379,29.543 148.587,29.335 v4(148.587,29.247)
CS#: DISP1.24 U1.11 | length 13
  Layer 2 w0.1: v3(139.9,40.5) 143.7,40.5 144.6,41.4 v3(144.6,46.9)
  Bottom Layer w0.1: v3(139.9,40.5) 140.025,40.375 DISP1.24@140.505,40.375 ; v3(144.6,46.9) U1.11@146.34,46.9
D1_N: J3.A7 J4.A7 TVS6.5 TVS6.6 TVS7.5 TVS7.6 | length 46.3
  Top Layer w0.125: J3.A7@149.292,75.323 149.292,75.023 149.416,74.899 149.416,73.359 150.278,72.497 150.278,71.628 150.205,71.555 150.191,71.555 150.154,71.517 TVS6.5@150.154,71.335 TVS6.6@150.154,70.5 150.154,70.317 150.191,70.28 150.205,70.28 150.278,70.207 150.278,34.961 150.205,34.887 150.191,34.887 150.154,34.85 TVS7.5@150.154,34.667 TVS7.6@150.154,33.833 150.154,33.65 150.191,33.613 150.205,33.613 150.278,33.539 150.278,32.368 149.541,31.631 149.541,30.438 149.417,30.314 J4.A7@149.417,30.064
D1_P: J3.A6 J4.A6 TVS6.4 TVS6.7 TVS7.4 TVS7.7 | length 46.3
  Top Layer w0.125: J3.A6@149.792,75.323 149.792,75.023 149.668,74.899 149.668,73.463 150.53,72.602 150.53,71.628 150.603,71.555 150.616,71.555 150.654,71.517 TVS6.4@150.654,71.335 TVS6.7@150.654,70.5 150.654,70.317 150.616,70.28 150.603,70.28 150.53,70.207 150.53,34.961 150.603,34.887 150.616,34.887 150.654,34.85 TVS7.4@150.654,34.667 TVS7.7@150.654,33.833 150.654,33.65 150.616,33.613 150.603,33.613 150.53,33.539 150.53,32.264 149.793,31.527 149.793,30.438 149.917,30.314 J4.A6@149.917,30.064
D2_N: J3.B7 J4.B7 TVS8.5 TVS8.6 TVS9.5 TVS9.6 | length 49.1
  Top Layer w0.125: TVS9.5@148.832,33.65 148.795,33.613 148.782,33.613 148.708,33.539 148.708,32.903 148.926,32.685 149.156,32.685 v4(149.208,32.633) ; TVS9.5@148.832,33.833 148.832,34.85 148.795,34.887 148.782,34.887 148.708,34.961 148.708,70.207 148.782,70.28 148.795,70.28 148.832,70.317 TVS8.6@148.832,71.335 ; TVS8.6@148.832,71.517 148.795,71.555 148.782,71.555 148.708,71.628 148.708,72.234 148.891,72.417 v4(148.891,72.483) ; J4.B7@149.667,28.564 149.704,28.601 149.704,29.238 v4(149.741,29.275)
  Bottom Layer w0.125: v4(148.891,72.483) 148.891,72.549 148.722,72.718 148.722,72.936 149.672,73.886 149.672,76.222 149.942,76.493 J3.B7@149.942,76.533 ; v4(149.208,32.633) 149.26,32.581 149.26,32.351 149.578,32.033 149.578,29.511 149.741,29.348 v4(149.741,29.275)
D2_P: J3.B6 J4.B6 TVS8.4 TVS8.7 TVS9.4 TVS9.7 | length 49
  Top Layer w0.125: v4(148.3,72.5) 148.3,72.421 148.456,72.264 148.456,71.628 148.383,71.555 148.37,71.555 TVS8.7@148.332,71.517 ; TVS9.4@148.332,33.65 148.37,33.613 148.383,33.613 148.456,33.539 148.456,32.798 148.748,32.507 148.748,32.277 v4(148.8,32.225) ; TVS9.4@148.332,33.833 148.332,34.85 148.37,34.887 148.383,34.887 148.456,34.961 148.456,70.207 148.383,70.28 148.37,70.28 148.332,70.317 TVS8.7@148.332,71.335 ; v4(149.164,29.275) 149.165,29.273 J4.B6@149.167,28.564 J4.B6@149.167,28.564
  Bottom Layer w0.125: v4(148.3,72.5) 148.3,72.566 148.47,72.736 148.47,73.04 149.42,73.99 149.42,76.205 149.142,76.483 J3.B6@149.142,76.533 ; v4(148.8,32.225) 148.852,32.173 149.082,32.173 149.326,31.929 149.326,29.511 149.164,29.348 v4(149.164,29.275)
D/C#: DISP1.20 U1.9 | length 10
  Bottom Layer w0.1: DISP1.20@140.505,41.075 143.375,41.075 144.1,41.8 144.1,45.5 144.5,45.9 U1.9@146.34,45.9
DUT_VCC_USB_C: J4.A4 J4.A9 J4.B4 J4.B9 R9.2 R10.2 R11.1 R12.1 R13.1 R15.1 TVS3.4 TVS3.5 TVS3.6 | length 31.9
  Top Layer w0.2: J4.B4@148.167,28.564 148.167,29.413 148.367,29.613 148.367,30.014 J4.A9@148.417,30.064 ; J4.B9@150.667,28.564 150.717,28.614 150.717,29.035 150.77,29.088 150.77,29.667 150.917,29.814 J4.A4@150.917,30.064
  Top Layer w0.3: J4.A9@148.417,30.064 148.417,30.858 ; J4.A4@150.917,30.064 150.917,30.967
  Top Layer w0.4: v4(146.241,36.273) 146.241,34.698 146.17,34.627 146.17,33.105 148.417,30.858 ; 150.917,30.967 152.832,32.882 152.832,36.368 v4(152.8,36.4)
  Bottom Layer w0.3: R11.1@146.202,37.728 R10.2@151.155,37.728 151.19,37.694 152.363,37.694 152.653,37.404 152.823,37.404
  Bottom Layer w0.4: v4(146.241,36.273) 152.587,36.273 152.675,36.362 152.762,36.362 v4(152.8,36.4) 152.8,36.454 152.745,36.509 152.745,36.918 152.823,36.995 152.823,37.404
  other v3: 153,38.5 154.3,38.5 153,39.4 154.3,39.4 155.5,39.4 154.3,40.4 155.5,40.4 154.3,55.8 155.5,55.8 153,56.8 154.3,56.8 155.5,56.8 154.3,57.9 155.5,57.9